# Altium PCB 网关模块8266_1278.PcbDoc
Units mil, origin at the board's own origin, x right, y up, seen from the top; angles counter-clockwise.
Board outline 805.03 x 1542.03 mil, 2 copper layers (Top Layer, Bottom Layer); 53 components, 42 nets, 188 pads, 178 vias.
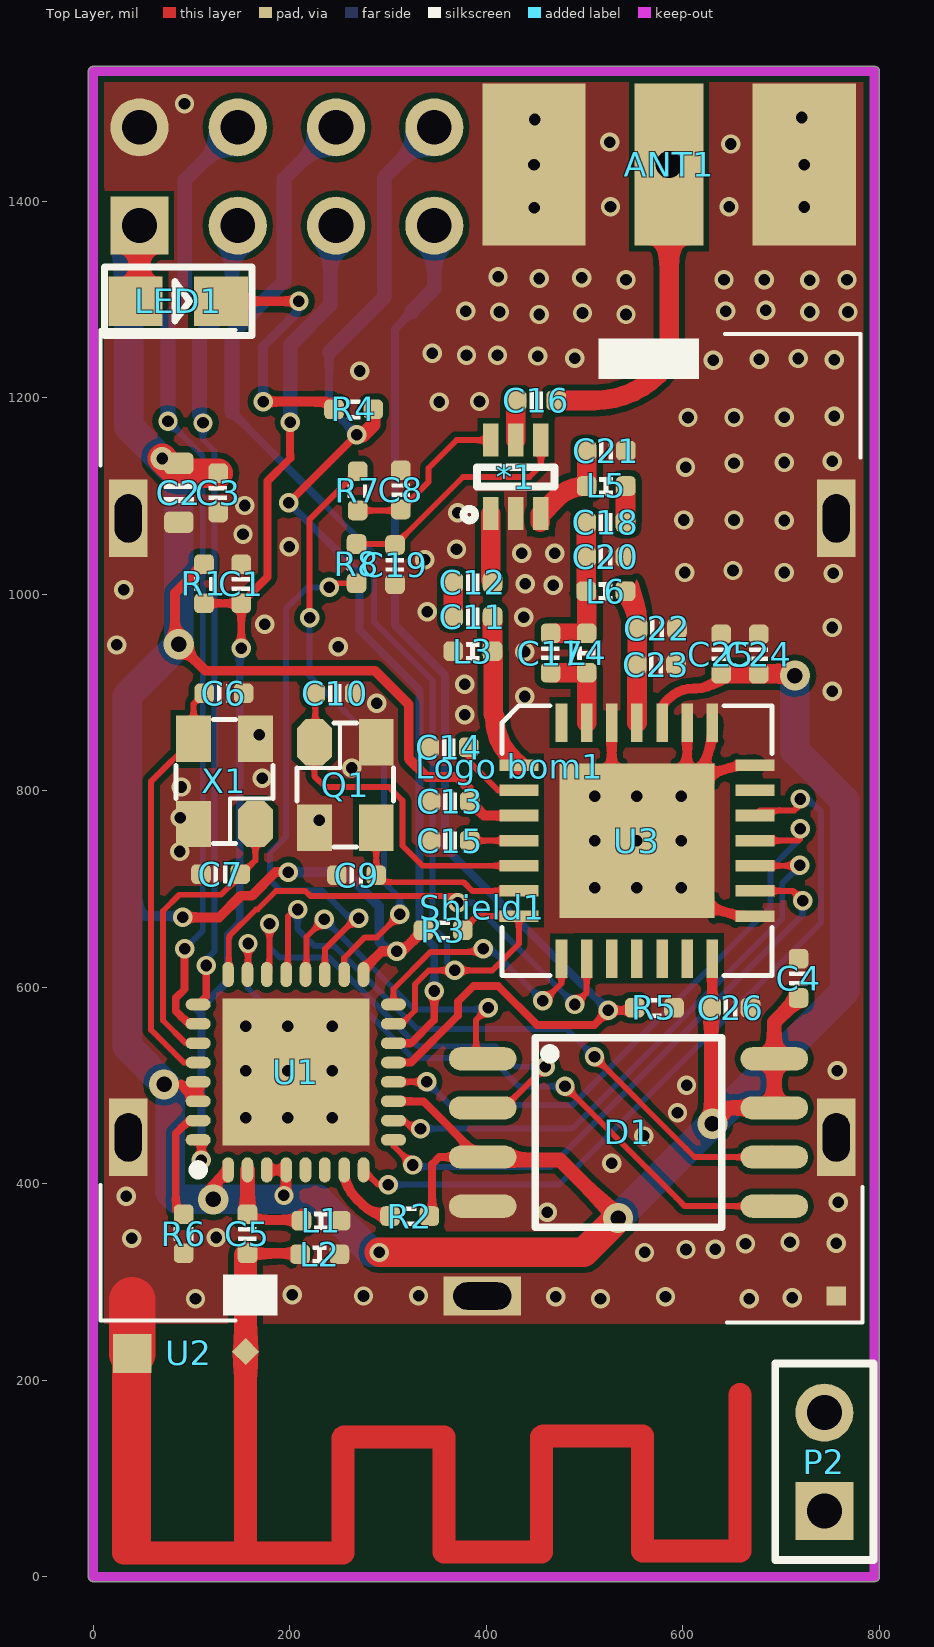
[diagram p0: Top Layer view]
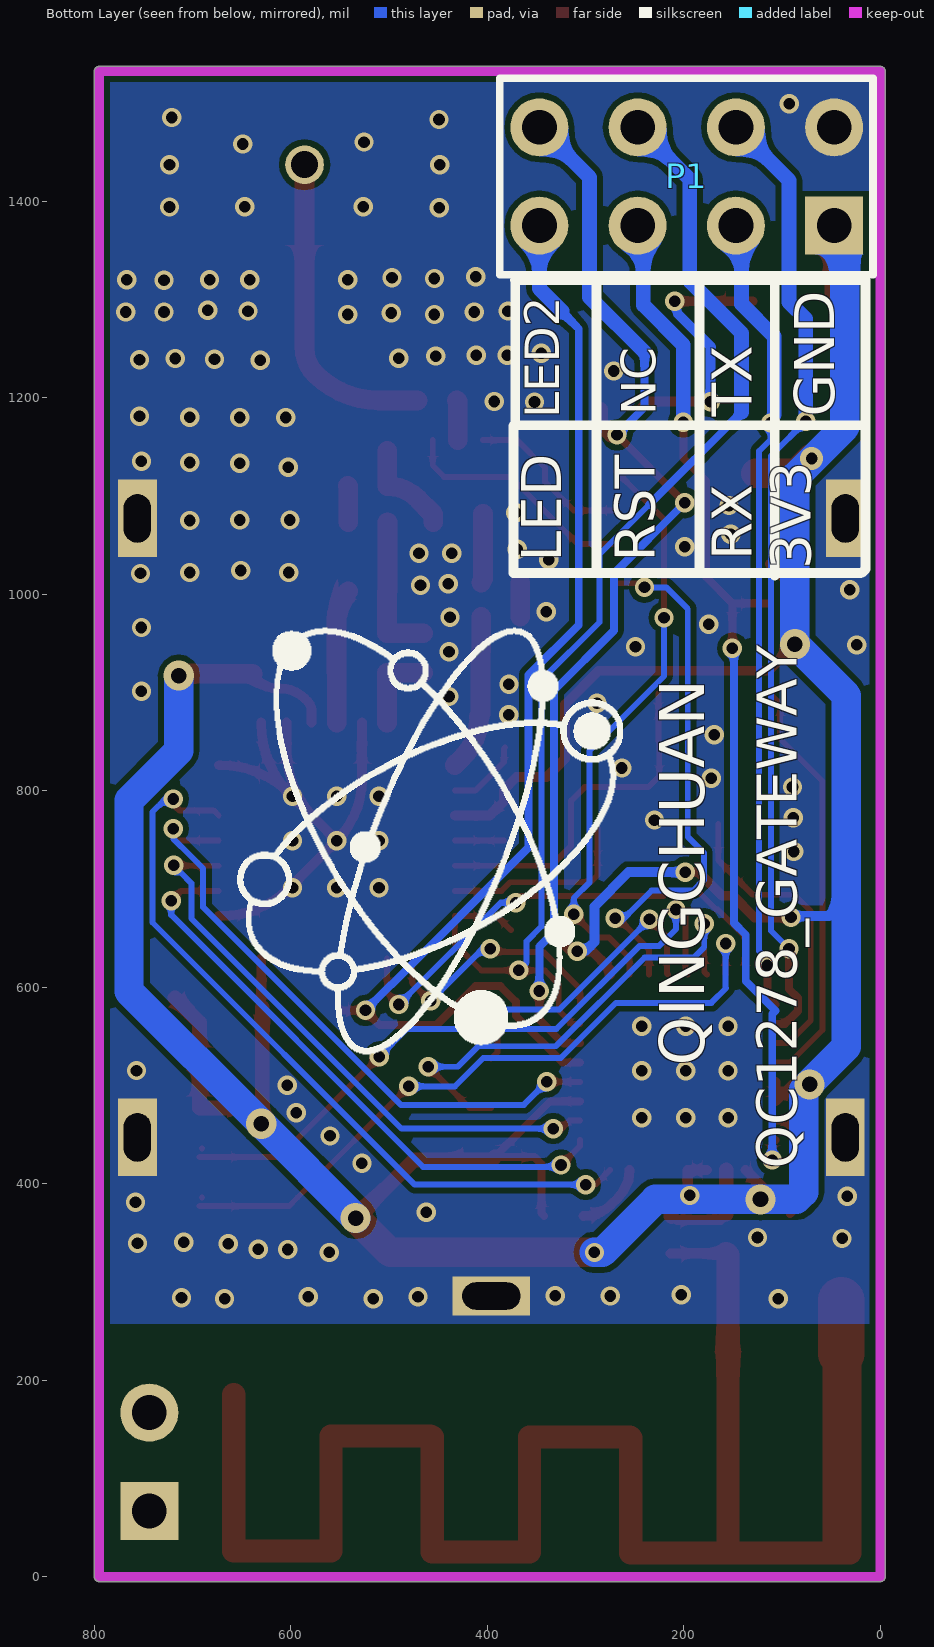
[diagram p1: Bottom Layer view, seen from below]
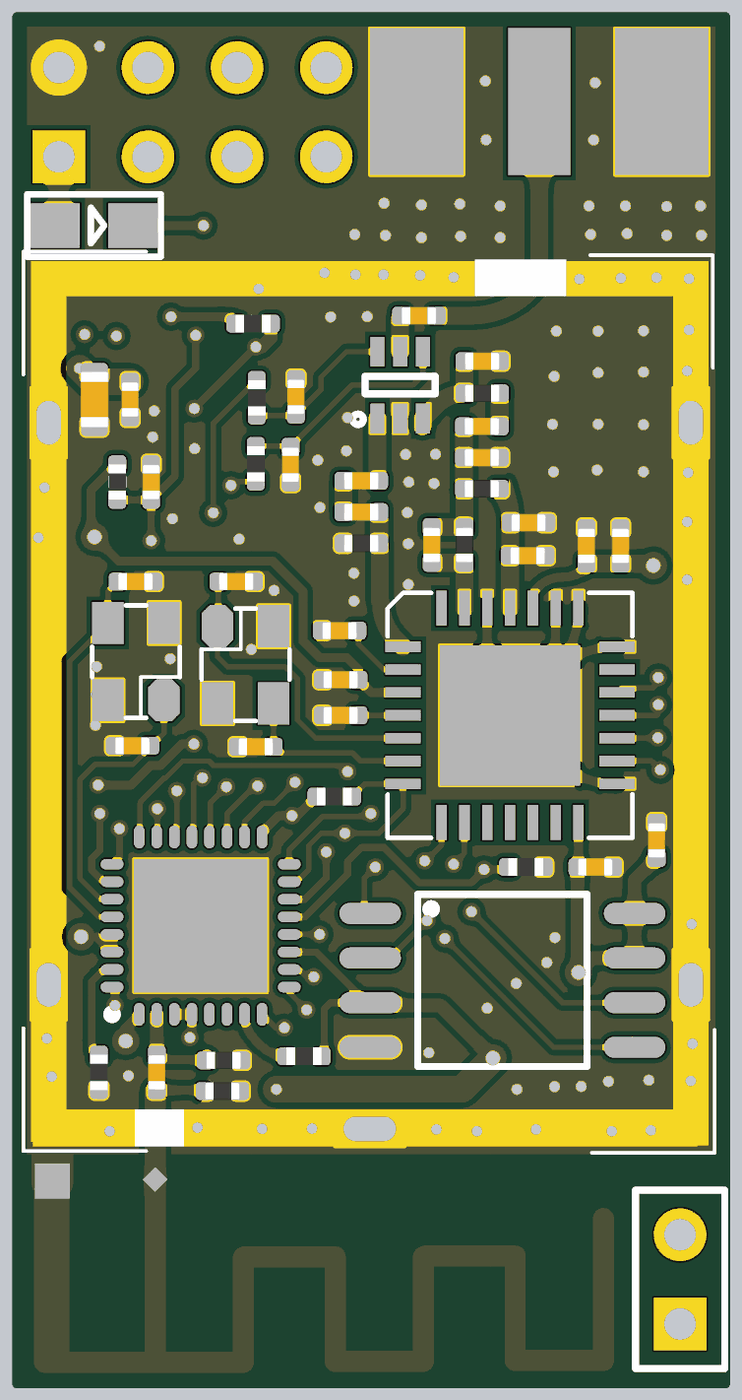
[diagram p2: 3D render of the assembled board from above, using the file's embedded part models]

## Layer stack, top to bottom
Top Solder: solder mask 0.4, Solder Resist, Dk 3.5
Top Layer: signal copper 1.4
Dielectric 1: dielectric 12.6, FR-4, Dk 4.8
Bottom Layer: signal copper 1.4
Bottom Solder: solder mask 0.4, Solder Resist, Dk 3.5

## Board outline
0,-5.01 cw(c0,0) -5.02,0 -5.02,1532 cw(c0,1532) 0,1537.02 795,1537.02 cw(c795,1532) 800.01,1532 800.01,0 cw(c795,0) 795,-5.01

## Design rules (kind name [scope] priority, off if disabled: settings)
Clearance "Stitching No Net" [IsStitchingVia and InNet('No Net') vs (IsVia and (Not IsStitchingVia)) Or IsPad] p1: gap=39.37 ignorepadtopadclearanceinfootprint=FALSE
Clearance [All] p2: gap=6 ignorepadtopadclearanceinfootprint=FALSE
HoleSize [All] p1: absolutevalues=TRUE maxlimit=60 minlimit=3 maxpercent=80.000 minpercent=20.000
HoleToHoleClearance [All] p1: gap=15.75 allowstackedmicrovias=TRUE
MinimumSolderMaskSliver [All] p1: minsoldermaskwidth=0
PlaneConnect [All] p1: planeconnectstyle=Direct reliefexpansion=20 reliefentries=4 reliefconductorwidth=10 reliefairgap=10
PolygonConnect [All] p1: connectstyle=Direct reliefconductorwidth=10 reliefentries=4 polygonreliefangle="90 Angle" airgapwidth=10
RoutingVias [All] p1: holewidth=11.81 width=19.68 viastyle="Through Hole" minholewidth=11.81 minwidth=19.68 maxholewidth=30.81 maxwidth=50.62
SilkToSilkClearance [All] p1: silktosilkclearance=0
SilkToSolderMaskClearance [IsPad] p1: minsilkscreentomaskgap=0 clearancetoexposedcopper=TRUE
SolderMaskExpansion [All] p1: expansion=1.97 useseparateexpansions=TRUE expansionbottom=1.97 soldermaskfromhole=TRUE
Width [All] p1: maxlimit=50 minlimit=6 preferedwidth=6
24 further rules are at their usual default settings.

## Components (designator, comment, footprint, x,y, rotation, side; value= is the part's Value field where it differs from the comment)
*1 "CKRF2179MM26" SC70-6 429.96,1119.2 r90 top
ANT1 "SMA" SMA_EDGE 586,1437 r90 top
C1 "104" CAP_0402 150.59,1010.5 r270 top value=?F
C2 "10uF" CAP_0603 87,1103 r90 top
C3 "104" CAP_0402 127,1103 r90 top value=?F
C4 "104" CAP_0402 717.74,609 r90 top value=?F
C5 "6.8pF" CAP_0402 156.89,349 r90 top value=?F
C6 "9pF" CAP_0402 133,899 r180 top value=?F
C7 "9pF" CAP_0402 129.59,715 r0 top value=?F
C8 "NC" CAP_0402 313,1106 r270 top value=?F
C9 "12PF" CAP_0402 267.91,714 r0 top value=?F
C10 "12PF" CAP_0402 246,899 r180 top value=?F
C11 "22PF" CAP_0402 386.32,976.85 r0 top value=?F
C12 "0" CAP_0402 386.32,1011.85 r180 top value=?F
C13 "104" CAP_0402 363.16,789 r0 top value=?F
C14 "104" CAP_0402 362,844 r0 top value=?F
C15 "104" CAP_0402 363.16,749.08 r0 top value=?F
C16 "56pf" CAP_0402 451,1197 r180 top value=?F
C17 "6.8PF" CAP_0402 465.35,940 r270 top value=?F
C18 "22PF" CAP_0402 521.62,1072.99 r180 top value=?F
C19 "NC" CAP_0402 307,1030 r270 top value=?F
C20 "18PF" CAP_0402 521.62,1038 r180 top value=?F
C21 "6.8PF" CAP_0402 522,1146 r180 top value=?F
C22 "10NF" CAP_0402 574,965 r180 top value=?F
C23 "56PF" CAP_0402 573,928 r180 top value=?F
C24 "104" CAP_0402 677.25,939 r270 top value=?F
C25 "56PF" CAP_0402 639,939 r270 top value=?F
C26 "104" CAP_0402 648.84,579 r0 top value=?F
D1 "W25Q32" W25Q128-1 544.65,452.09 r0 top
L1 "NC" IND_0402 231.82,362.39 r0 top
L2 "NC" IND_0402 230.5,328 r0 top
L3 "33NH" IND_0402 386.32,941.85 r0 top
L4 "3.6NH" IND_0402 502.05,940 r90 top
L5 "18NH" IND_0402 522,1110 r180 top
L6 "18NH" IND_0402 521.62,1003 r180 top
LED1 "BLUE_LED_0603" SMDLED 42.96,1298.06 r0 top
"Logo bom1" "Logo symbol" logo1 424,825 r180 top
P1 "Header 4X2" "MY HDR 2X4" 170.78,1425 r180 bottom
P2 "Header 2" HDR1X2 744,67 r90 top
Q1 "32MHz" 3325 255,804 r270 top value=32.0MHz
R1 "12K" RES_0402 112.59,1010.5 r90 top value=12k
R2 "12K" RES_0402 322,367 r0 top value=12k
R3 "12K" RES_0402 356,658 r180 top value=12k
R4 "820" RES_0402 264.91,1188 r180 top value=12K
R5 "12K" RES_0402 571,579 r0 top value=12k
R6 "12K" RES_0402 91.99,349 r270 top value=12k
R7 "100" RES_0402 269,1105 r270 top
R8 "100" RES_0402 267.91,1031 r90 top
Shield1 "Logo symbol" 24*18_8266 756.09,285.66 r90 top
U1 "ESP8266" ESP8266 206.1,513.41 r90 top
U2 "PCB_ANT" BLE-ANT4 154.8,229.18 r0 top
U3 "SX1278" QFN-28 433.15,825.85 r0 top
X1 "26MHz" CY_3225 135,809 r90 top

## Footprints (in the part's own frame and the unit in brackets; to place one, negate y for a bottom-side part, rotate by r counter-clockwise, add the part's x,y. Pads: shape width x height; smd on the part's side, far side on the other; paste and mask are expansions set on the pad)
24*18_8266 [mm]
  rect 1x2 hole 0.7 slot 1.5 at 90 deg paste+0 mask+0.05: 1(0,9.15)
  rect 0.5x0.5 smd paste-1 mask+0.05: 1(0,0)
  rect 2x1 hole 0.7 slot 1.25 at 0 deg paste+0 mask+0.05: 1(4.1,18.3) 1(4.1,0) 1(20.1,0) 1(20.1,18.3)
  silkscreen extent -0.68,-0.68 24.97,19.02, body extent -0.3,-0.3 0.3,0.3, height 1
3325 [mm]
  oct 1.2x0.9 smd: 1(-1.143,-0.762)
  rect 1.2x0.9 smd: 2(1.057,-0.762) 3(1.057,0.838) 4(-1.143,0.838)
  silkscreen extent -1.64,-1.21 1.56,1.29
BLE-ANT4 [mm]
  rect 0.5x0.5 smd rot 45: 1(0.005,-0.005)
  rect 1x1 smd: 2(-2.923,-0.052)
  Top Layer lines w0.6: -3.145,-0.052 -3.145,-5.208 -2.738,-5.208 ; -2.738,-0.005 -2.738,-0.052 -2.738,-5.208 ; 0.005,-0.005 0.005,-5.208 ; 5.103,-2.211 2.545,-2.211 2.52,-2.236 2.52,-5.208 0.005,-5.208 ; 5.136,-2.211 5.136,-5.183 7.65,-5.183 7.65,-2.211 ; 7.701,-2.186 10.267,-2.186 10.267,-5.157 12.781,-5.157 12.781,-1.119 ; -2.738,-5.208 0.005,-5.208
CAP_0402 [mil]
  rrect50% 20x20 smd: 1(-20,0) 2(20,0)
  silkscreen extent -7,-9 7,9, body extent -20,-10 20,10, height 20
CAP_0603 [mil]
  rrect50% 22x30 smd: 1(-30,0) 2(30,0)
  silkscreen extent -10,-15 10,15, body extent -31,-16 31,16, height 31
CY_3225 [mm]
  oct 1.2x0.9 smd: 1(-1.093,-0.762)
  rect 1.2x0.9 smd: 2(1.107,-0.762) 3(1.107,0.838) 4(-1.093,0.838)
  silkscreen extent -1.59,-1.21 1.61,1.29
ESP8266 [mm] "QFN, 32-Leads, Body 5.0x5.0mm (max), Pitch 0.50mm, IPC Medium Density"
  oval 0.65x0.3 smd: 1(-2.525,1.75) 2(-2.525,1.25) 3(-2.525,0.75) 4(-2.525,0.25) 5(-2.525,-0.25) 6(-2.525,-0.75) 7(-2.525,-1.25) 8(-2.525,-1.75) 17(2.525,-1.75) 18(2.525,-1.25) 19(2.525,-0.75) 20(2.525,-0.25) 21(2.525,0.25) 22(2.525,0.75) 23(2.525,1.25) 24(2.525,1.75)
  oval 0.3x0.65 smd: 9(-1.75,-2.525) 10(-1.25,-2.525) 11(-0.75,-2.525) 12(-0.25,-2.525) 13(0.25,-2.525) 14(0.75,-2.525) 15(1.25,-2.525) 16(1.75,-2.525) 25(1.75,2.525) 26(1.25,2.525) 27(0.75,2.525) 28(0.25,2.525) 29(-0.25,2.525) 30(-0.75,2.525) 31(-1.25,2.525) 32(-1.75,2.525)
  rect 3.8x3.8 smd: 33(0,0)
  silkscreen extent -2.65,2.4 -2.4,2.65
HDR1X2 [mm] "Connector; Header; 2 Position"
  rect 1.5x1.5 hole 0.9 mask+0.05: 1(0,0)
  round 1.5 hole 0.9 mask+0.05: 2(2.54,0)
  silkscreen extent -1.27,-1.27 3.81,1.27
IND_0402 [mil]
  rrect50% 20x20 smd: 1(-20,0) 2(20,0)
  silkscreen extent -6,-9 6,9, body extent -20,-10 20,10, height 20
logo1 [mil]
"MY HDR 2X4" [mm]
  rect 1.5x1.5 hole 0.9 mask+0.05: 1(3.144,-1.27)
  round 1.5 hole 0.9 mask+0.05: 2(3.144,1.27) 3(0.604,-1.27) 4(0.604,1.27) 5(-1.936,-1.27) 6(-1.936,1.27) 7(-4.476,-1.27) 8(-4.476,1.27)
  silkscreen extent -5.5,-2.54 4.15,2.54
QFN-28 [mm]
  rect 4x4 smd: 0(3.05,-1.95)
  rect 1x0.3 smd: 1(0,0) 2(0,-0.65) 3(0,-1.3) 4(0,-1.95) 5(0,-2.6) 6(0,-3.25) 7(0,-3.9) 15(6.1,-3.9) 16(6.1,-3.25) 17(6.1,-2.6) 18(6.1,-1.95) 19(6.1,-1.3) 20(6.1,-0.65) 21(6.1,0)
  rect 0.3x1 smd: 8(1.1,-5) 9(1.75,-5) 10(2.4,-5) 11(3.05,-5) 12(3.7,-5) 13(4.35,-5) 14(5,-5) 22(5,1.1) 23(4.35,1.1) 24(3.7,1.1) 25(3.05,1.1) 26(2.4,1.1) 27(1.75,1.1) 28(1.1,1.1)
  silkscreen extent -0.44,-5.44 6.54,1.54
RES_0402 [mil]
  rrect50% 20x20 smd: 1(-20,0) 2(20,0)
  silkscreen extent -7,-10 7,10, body extent -20,-10 20,10, height 14
SC70-6 [mm] "SC70 6-Leads, Body 2.0x1.25mm, Pitch 0.65mm"
  rect 0.85x0.4 smd mask+0.05: 1(-0.95,0.65) 2(-0.95,0) 3(-0.95,-0.65) 4(0.95,-0.65) 5(0.95,0) 6(0.95,0.65)
  silkscreen extent -1.12,-1 0.25,1.35, body extent -0.63,-1 0.63,1, height 1.45
SMA_EDGE [mil] "SMA Edge connector - modified"
  rect 165x70 smd mask+1.97: 1(0,0)
  round 39.37 hole 27.56: 1(0,0)
  rect 165x105 smd mask+1.97: 2(0,137.5) 2(0,-137.5)
SMDLED [mm]
  rect 1.4x1.27 smd: 1(0.001,-0.002) 2(2.211,-0.002)
  silkscreen extent -0.8,-0.89 3.01,0.89
W25Q128-1 [mm] "SPI_FLASH"
  oval 1.75x0.6 smd: 1(-3.768,1.905) 2(-3.768,0.635) 3(-3.768,-0.635) 4(-3.768,-1.905) 5(3.768,-1.905) 6(3.768,-0.635) 7(3.768,0.635) 8(3.768,1.905)
  silkscreen extent -2.41,-2.45 2.41,2.45

## Part data
*1: library part PE4259
ANT1: "SMA Straight Connector", LatestRevisionDate="05-oct-2007  -  Semtech", LatestRevisionNote="Re-released for DXP Platform.", Publisher="Altium Limited"
C1 C3 C4 C5 C6 C7 C8 C9 C10 C11 C12 C13 C14 C15 C16 C17 C18 C19 C20 C21 C22 C23 C24 C25 C26: library part Cap_0402, "Capacitor", Type=0402
C2: library part Cap_0603, "Capacitor", Type=0603
D1: library part W25Q128
L1 L2 L3 L4 L5 L6: library part Ind_0402, "Inductor", Type=0402
LED1: library part LED2, "Typical RED, GREEN, YELLOW, AMBER GaAs LED", PackageDocument=Feb-2002, LatestRevisionDate=17-Jul-2002, LatestRevisionNote="Re-released for DXP Platform.", PackageReference=3.2X1.6X1.1, Published=8-Jun-2000, Publisher="Altium Limited"
"Logo bom1": library part Logo, "qc symbol for Logo"
P1: "Header, 4-Pin, Dual row", LatestRevisionDate=17-Jul-2002, LatestRevisionNote="Re-released for DXP Platform.", Publisher="Altium Limited"
P2: "Header, 2-Pin", LatestRevisionDate=17-Jul-2002, LatestRevisionNote="Re-released for DXP Platform.", Publisher="Altium Limited"
Q1: library part "Xtal GND", "32M无源晶振 10PPM   年老化3ppm以内", LatestRevisionDate="05-oct-2007  -  Semtech"
R1 R2 R3 R4 R5 R6 R7 R8: library part Res_0402, "Resistor", Type=0402
Shield1: library part Shield, "Shield - EMI Gasket - Standard Surface Mount Shields"
U2: library part 天线
X1: library part XTAL, "24M无源晶振（10ppm）", LatestRevisionDate=17-Jul-2002, LatestRevisionNote="Re-released for DXP Platform.", PackageReference=R38, Published=8-Jun-2000, Publisher="Altium Limited"

## Via types
v1: diameter 19.68, hole 11.81, Top Layer to Bottom Layer, tented both sides, 171 vias
v2: diameter 30.68, hole 15.81, Top Layer to Bottom Layer, tented both sides, 6 vias
v3: diameter 23.62, hole 11.81, Top Layer to Bottom Layer, tented both sides, 1 vias

## Nets (pads, with @x,y where several pads share a name; then routed paths per layer and width w, separated by ;. In a path a pad name is that pad's centre, name@x,y a point inside that pad or via, vN(x,y) a via of type N, cw(c..) or ccw(c..) an arc to the next point about the centre after c; other vN are vias at no path point)
CS: U1.8 U3.19 | length 778
  Top Layer w6: U1.8 290,399 v1(300,399) ; U3.19 678.48,779.84 713.33,779.84 719.49,786 v1(719.49,791.49)
  Bottom Layer w6: v1(300,399) 474,399 740.67,665.67 740.67,778.33 727.51,791.49 v1(719.49,791.49)
D0: D1.2 U1.22 | length 488.9
  Top Layer w6: U1.22 179.29,615.54 v1(179.29,664.54) ; D1.2 418.09,477.09 v1(460,519)
  Bottom Layer w6: v1(179.29,664.54) 179.29,640.71 190,630 240.06,630 330.22,539.84 409.12,539.84 429.96,519 v1(460,519)
D1: D1.5 U1.23 | length 705.6
  Top Layer w6: U1.23 157.48,613.41 v1(157.48,644.36) ; v1(480,499) 593.17,385.83 601.91,377.09 D1.5 ; D1.5@690.37,385.83 D1.5@690.54,386
  Bottom Layer w6: v1(157.48,644.36) 157.48,599.7 156.89,599.11 172,584 269.09,584 325.25,527.84 404.15,527.84 432.99,499 v1(480,499)
DI0: U1.16 U3.8 | length 258.2
  Top Layer w6: U1.16 305.51,598.13 343.22,635.84 393.84,635.84 v1(397,639) ; v1(457.51,586) 458.65,586 476.46,603.81 U3.8
  Bottom Layer w6: v1(397,639) 404.51,639 v1(457.51,586)
DI1: U1.24 U3.9 | length 509.8
  Top Layer w6: U1.24 137.84,613.46 137.84,649.74 138.64,650.54 138.64,652.16 165.48,679 167.1,679 185.94,697.84 215.8,697.84 220.8,692.84 364.16,692.84 v1(371,686) ; v1(490,582.31) 502.05,594.35 U3.9
  Bottom Layer w6: v1(371,686) 386.31,686 v1(490,582.31)
EN: R2.1 U1.7 | length 72.5
  Top Layer w10: U1.7 ccw(c295.6,414) 267.11,385.51 274.05,378.58 ccw(c302,406.53) R2.1
FCLK: D1.6 U1.21 | length 671.1
  Top Layer w6: U1.21 198.13,614.69 198.13,672.13 v1@205,679 ; v1(510,529) 603.17,435.83 611.91,427.09 D1.6 ; D1.6@690.37,435.83 D1.6@690.54,436
  Bottom Layer w6: v1(208,679) 208,659 225,642 245.03,642 329.74,557.29 481.71,557.29 v1(510,529)
FCS: D1.1 U1.20 | length 329.7
  Top Layer w6: U1.20 217,613.87 217,651 v1(235,669) ; D1.1 389.65,533.74 389.65,566.65 v1(402,579)
  Bottom Layer w6: v1(235,669) 326.84,577.16 400.16,577.16 v1(402,579)
GND: *1.2 ANT1.2 C1.1 C2.1 C3.1 C4.2 C5.1 C6.1 C7.1 C8.1 C9.1 C10.1 C13.1 C14.1 C15.1 C19.2 C20.1 C21.1 C22.1 C23.1 C24.1 C25.1 C26.2 D1.4 L1.2 L2.1 L2.2 L3.1 P1.2 Q1.2 Q1.4 R5.2 R6.2 Shield1.1 U1.33 U2.1 U2.2 U3.0 U3.15 U3.21 U3.22 U3.23 U3.26 X1.2 X1.4 | length 817.7
  Top Layer w10: C5.1 L2.1@213.5,329 ; U3.26 527.64,810.86 ccw(c615.01,810.86) v1(553.23,749.08) ; U3.23 604.41,841.68 cw(c504.41,841.68) U3.0@575.12,770.97 ; U3.22 630,867.27 cw(c530,867.27) U3.0@600.71,796.56 ; U3.15 671.42,672.31 cw(c671.42,772.31) 600.71,701.6 v1(553.23,749.08) ; U3.21 671.42,825.85 ccw(c671.42,725.85) U3.0@600.71,796.56 ; v1(553.23,749.08) U3.0@575.12,770.97 ; U3.0@575.12,770.97 v1(598.23,794.08) U3.0@600.71,796.56
  Top Layer w23.62: U2.1 C5.1@155,327.11
  Top Layer w47.24: U2.2 39.71,281.57
  other v1: 104,283 516.16,283 667.41,283 711.2,284 470.57,285 582.33,285 275,285.66 331,286 202.49,287 561,330 603.18,333 633,333.29 663.71,338.85 756,339.36 708.98,340.22 39,344.25 125.07,345.14 462,371 758,381 33.62,387 527.61,420.89 560.16,448.55 155,467 198,467 243,467 594.49,472 603.75,500 155,515 198,515 243,515 757,515.08 155,560 198,560 243,560 510.23,701.08 553.23,701.08 598.23,701.08 88,738 510.23,749.08 598.23,749.08 229.82,770 88.59,772.42 510.23,794.08 553.23,794.08 89.43,803.63 172,812.48 263,822.96 169,857 378.16,877.09 288.42,889 439,895.72 752,901 378,908.39 439,941.44 249.19,946.5 24,948.23 752,966 174.49,969.4 438,976.35 340,982 31,1004.27 468,1008.93 439.64,1010.5 753,1021 602,1022 702.99,1022 651,1024 337.48,1034.99 436.1,1041.42 469.57,1041.71 369.66,1045.5 199.24,1048 152.38,1061 600.89,1075.34 652,1075.34 702.99,1074.85 371,1082.83 154,1090.11 602.72,1129 652,1133 702.99,1133.85 752,1135.08 605.17,1179.66 652,1179.66 702.99,1180 754,1181 352,1195.51 393,1196 271.22,1227 631,1238 754,1238.42 677.6,1239 490,1240 717.58,1239.71 452.42,1242.21 379.82,1243 411.32,1243 345,1245 453.82,1284.49 542.11,1284.49 497.85,1286 413.42,1287 729,1287 768,1287 379,1288 643.61,1288 684.52,1288.95 729,1319.4 542.11,1320 641.81,1320 682.67,1320 767,1320 453.82,1321.12 497,1322.07 411.9,1323 448.76,1393 526.37,1394 647,1394 723.5,1393.96 448.5,1437 723.5,1437 648.84,1458 525.52,1460 449.14,1483 721,1485 92.83,1499
IO2: P1.8 R4.1 U1.14 | length 1142.3
  Top Layer w8: v1(199,1093) v1(268,1162) ; U1.14 323.25,542.94 347,566.69 v1(347,596)
  Top Layer w15: v1(268,1162) 274.51,1162 284.91,1172.4 R4.1
  Bottom Layer w8: v1(199,1093) 271.06,1020.94 271.06,962.94 332,902 332,656.31 347,641.31 v1(347,596) ; 240,1246 240,1190 v1(268,1162)
  Bottom Layer w15: 240,1246 296,1302 296,1424 P1.8
IO9: R7.1 U1.18 | length 601.2
  Top Layer w6: v1(220.16,976) 220.16,1076.16 R7.1 ; U1.18 255.32,629.65 276.32,650.65 288.65,650.65 v1(312,674)
  Bottom Layer w6: v1(220.16,976) 220.16,916.44 295.84,840.76 295.84,706.77 312,690.61 v1(312,674)
IO10: R8.1 U1.19 | length 548.6
  Top Layer w6: U1.19 235.63,638.59 262.9,665.86 262.9,669.1 263.8,670 v1(270,670) ; v1(240.06,1006.88) 244.18,1011 R8.1
  Bottom Layer w6: v1(240.06,1006.88) 217.91,1006.88 196,984.97 196,753 179.66,736.66 179.66,709.2 190.7,698.16 232.84,698.16 262.35,668.65 262.35,669.65 262.7,670 v1(270,670)
IO15_F: P1.7 R5.1 U1.13 | length 1223.8
  Top Layer w8: U1.13 323.36,523.25 371,570.89 371,585.25 386.75,601 412.16,601 451.66,561.5 509.76,561.5 v1@524.62,576.37 ; v1(524,576.37) v1@524.62,576.37 ; R5.1 548.37,576.37 v1@524.62,576.37
  Bottom Layer w8: 324,1287 307,1270 307,968.56 358,917.56 358,742 497.85,602.15 498.22,602.15 v1(524,576.37)
  Bottom Layer w15: 324,1287 324,1288 347,1311 P1.7 P1.7@341.22,1369.22
MISO: U1.10 U3.17 | length 607.8
  Top Layer w6: U1.10 316.58,464.2 324.78,456 v1(333,456) ; U3.17 719.49,723.49 v1(719,724)
  Bottom Layer w6: v1(333,456) 487.32,456 701.16,669.83 701.16,705.7 712.2,716.74 717.74,716.74 725,724 v1(719,724)
MOSI: U1.12 U3.18 | length 626
  Top Layer w6: U1.12 v1(339.43,503.57) ; U3.18 717.58,749.08 719.49,750.99 v1(719.49,761)
  Bottom Layer w6: v1(339.43,503.57) 362.84,480.16 488.04,480.16 689.16,681.28 689.16,720.8 711.2,742.84 711.34,742.84 719.49,750.99 v1(719.49,761)
Net*1_1: *1.1 C12.1 | length 70.5
  Top Layer w20: *1.1 404.37,1016.55 ccw(c411.02,1016.55) C12.1
Net*1_3: *1.3 C21.2 L5.2 | length 101.3
  Top Layer w20: *1.3@455,1073 455,1081.25 *1.3 470.85,1097.1 cw(c502,1065.94) L5.2 C21.2
Net*1_4: *1.4 C19.1 R8.2 | length 247.3
  Top Layer w6: R8.2 306,1051 C19.1 376.2,1119.2 443.98,1119.2 455.55,1130.77 *1.4
Net*1_5: *1.5 C16.2 | length 40.7
  Top Layer w20: *1.5 429.96,1194.49 cw(c433.51,1194.49) C16.2
Net*1_6: *1.6 C8.2 R7.2 | length 173.2
  Top Layer w6: R7.2 312,1085 C8.2 341.22,1114.22 341.22,1128.22 369.6,1156.6 *1.6
NetANT1_1: ANT1.1 C16.1 | length 327.2
  Top Layer w20: C16.1 509.94,1197 ccw(c509.94,1289.18) 575.12,1224 ccw(c548.85,1250.27) 586,1250.27 ANT1.1@586,1437
NetC5_2: C5.2 L1.1 U1.2 | length 106.7
  Top Layer w10: C5.2 162.73,363.16 206.63,363.16 211.74,368.26 L1.1@213,367
  Top Layer w15: C5.2 U1.2 ; L1.1@212.61,366.61 L1.1@213,367
NetC6_2: C6.2 U1.28 X1.3 | length 430.2
  Top Layer w6: U1.28 92,523.25 58.9,556.35 58.9,809.47 X1.3 102.01,888.01 C6.2 C6.2@116.65,899
NetC7_2: C7.2 U1.27 X1.1 | length 309.2
  Top Layer w6: U1.27 94.05,542.94 70.9,566.09 70.9,677.55 87.35,694 130,694 165,729 X1.1
NetC9_2: C9.2 Q1.3 U3.6 | length 200.3
  Top Layer w6: Q1.3 287.91,762.31 C9.2 295.15,706.77 376.88,706.77 385.75,697.9 U3.6
NetC10_2: C10.2 Q1.1 U3.5 | length 357.5
  Top Layer w6: C10.2 226,850 Q1.1 225,814.69 236.21,803.48 300.96,803.48 314.71,789.74 314.71,743.88 335.1,723.49 U3.5
NetC11_1: C11.1 C12.2 | length 35
  Top Layer w20: C11.1 C12.2
NetC11_2: C11.2 L3.2 U3.1 | length 155.9
  Top Layer w20: C11.2 L3.2 cw(c405.34,940.87) 406.72,940.87 407,940.59 407,878 ; 408.41,875 ccw(c467.34,875) 425.67,833.33 U3.1
NetC14_2: C14.2 U3.2 | length 77.4
  Top Layer w6: C14.2 383.16,842.84 383.16,829 411.9,800.26 U3.2
NetC15_2: C15.2 U3.4 | length 50
  Top Layer w6: C15.2 U3.4
NetC17_1: C17.1 C18.2 C20.2 L4.2 L6.2 | length 149.8
  Top Layer w20: C17.1 L4.2 502.05,1001.96 ccw(c500.58,1001.96) L6.2 C20.2 C18.2
NetC17_2: C17.2 L4.1 U3.27 | length 87.5
  Top Layer w20: C17.2 L4.1 U3.27
NetC18_1: C18.1 L5.1 | length 37.2
  Top Layer w20: C18.1 541.62,1109.62 L5.1
NetC22_2: C22.2 C23.2 L6.1 U3.25 | length 137.1
  Top Layer w20: L6.1 cw(c512.93,974.31) 553.5,974.31 553.5,957.75 553.5,921.07 553.23,920.79 U3.25
NetLED1_2: LED1.2 R4.2 | length 271.5
  Top Layer w10: LED1.2 v1(209.25,1298) ; v1(172.84,1195.84) 237.07,1195.84 R4.2
  Bottom Layer w10: v1(172.84,1195.84) 172.84,1250.64 172.16,1251.32 205.83,1285 ccw(c182.8,1298) v1(209.25,1298)
NetR6_1: R6.1 U1.31 | length 113.7
  Top Layer w8: R6.1 83.9,377.09 83.9,451.1 96.99,464.2 U1.31
NRESET: P1.6 R3.1 U1.15 U3.7 | length 1264.1
  Top Layer w6: U1.15 313.8,562.62 327.31,576.13 327.31,602.95 341.35,617 v1(367.91,617) 406,617 433.15,644.15 U3.7 390.31,672.31 R3.1
  Bottom Layer w6: 235.63,1090.59 285.85,1040.37 285.85,971.32 345,912.17 345,661.7 360,646.7 360,624.91 v1(367.91,617)
  Bottom Layer w8: 141.22,1185 235.63,1090.59
  Bottom Layer w15: 141.22,1185 141.22,1265.52 194,1318.3 194,1422 P1.6
RESET: C1.2 P1.5 R1.1 U1.32 | length 1070.5
  Top Layer w8: U1.32 110,441.2 v1(110,424) ; R1.1 C1.2 ; v1(150.59,944.91) C1.2 ; v1(200.5,1175) 200.31,1174.82 200.31,1141.78 200.5,1141.6 200.5,1138.21 177.35,1115.06 177.35,1017.26 C1.2
  Bottom Layer w8: v1(110,424) 110,572.69 106.69,576 136.99,606.3 136.99,653.34 149,665.35 149,943.33 v1(150.59,944.91)
  Bottom Layer w15: v1(200.5,1175) 200.5,1253.5 241.22,1294.22 241.22,1369.22 P1.5
RX: P1.3 U1.25 | length 821.3
  Top Layer w8: U1.25 115,590.61 v1(115,622)
  Bottom Layer w6: v1(111.58,1174.16) 111.58,1157.39 123.34,1145.63 123.34,636.65 115,628.31 v1(115,622)
  Bottom Layer w15: v1(111.58,1174.16) 108,1182.58 108,1262 141.22,1295.22 141.22,1369.22 P1.3
SCK: U1.9 U3.16 | length 605.6
  Top Layer w6: U1.9 305.51,438.49 v1(325,419) ; U3.16 711.93,697.9 v1(721.83,688)
  Bottom Layer w6: v1(325,419) 325,417.13 465.43,417.13 721.83,673.53 v1(721.83,688)
TX: P1.4 U1.26 | length 982.9
  Top Layer w8: v1(92.97,639) 92.97,597.97 83.9,588.9 83.9,575.72 96.99,562.62 U1.26
  Bottom Layer w6: v1(76,1176) 111.34,1140.66 111.34,657.37 v1(92.97,639)
  Bottom Layer w15: v1(76,1176) 76,1280 93,1297 93,1421 P1.4
VCC: C2.2 C3.2 C4.1 C13.2 C24.2 C25.2 C26.1 D1.3 D1.7 D1.8 LED1.1 P1.1 R1.2 R2.2 R3.2 U1.1 U1.3 U1.4 U1.11 U1.17 U1.29 U1.30 U3.3 U3.14 U3.24 | length 4381.7
  Top Layer w8: P1.1@42.99,1370.99 P1.1 ; U1.11 305.67,483.72 335.93,483.72 D1.3@392.57,427.09 ; R2.2 344.84,369.84 344.84,419.84 352.09,427.09 D1.3@392.57,427.09 ; D1.3@392.65,427 D1.3@392.57,427.09 ; D1.3 D1.3@392.57,427.09
  Top Layer w10: 89.57,501 U1.30 U1.29 ; v1(91,671) 128,671 150,693 161.3,693 185.3,717 v1(198.5,717) ; R1.2 83.09,1001 83.09,952.91 v2(87,949) 114,922 286.79,922 321,887.79 321,832.37 339.53,813.84 370.16,813.84 383.16,800.84 C13.2 397.49,774.67 U3.3 ; v2(122,384) 122,398.8 U1.1 ; U1.3 U1.4 196.26,390.26 v1(194,388) ; U1.17 275,618 293.65,636.65 v1(308.65,636.65) 314.65,636.65 R3.2 ; U3.24 578.82,880.91 cw(c593.09,880.91) 583,891 585.39,893.39 cw(c611,867.79) 611,904 613.44,904 ccw(c613.44,941.56) C25.2@640,915 ; C26.1 629,579.16 630,580.16 U3.14
  Top Layer w15: D1.3@392.65,427 395.65,424 475,424 v2(534,365) ; C26.1@629,579.16 629,462 v2(630,461) 646.09,477.09 D1.7 D1.8@693,520.43 ; D1.8 693,564.26 C4.1
  Top Layer w20: LED1.1 47,1302.01 P1.1 ; C25.2 C24.2 712,919 v2(714,917)
  Top Layer w30: v3(70,1138) 85,1123 C3.2 ; v1(291,330) 499,330 v2(534,365)
  Bottom Layer w10: 34.63,690 52.31,672.31 89.69,672.31 v1(91,671) ; v1(198.5,717) 256.17,717 291,682.17 291,646 300.35,636.65 v1(308.65,636.65)
  Bottom Layer w30: P1.1 36.16,1364.16 36.16,1170.05 87,1119.2 v2(87,949) 34.63,896.63 34.63,690 34.63,539.37 78.21,495.79 78.21,391.42 85.63,384 v2(122,384) 228.91,384 282.91,330 v1(291,330) ; v2(534,365) v2(630,461) 764.67,595.67 764.67,789.93 714,840.59 v2(714,917)
  other v2: 72,501
pads on no net: P2.1 P2.2 U1.5 U1.6 U3.10 U3.11 U3.12 U3.13 U3.20 U3.28

## Polygon pours and split planes (outlines as drawn)
GND on Top Layer "GND_L01_P022" (solid, remove dead copper, pour order 22): 0,1532 795,1532 795,257.19 0,257.19
no net on Top Layer "Top Layer-No Net" (solid, pour order 16): -4,880.91
no net on Top Layer "Top Layer-No Net 1" (solid, pour order 10): -5,1650
no net on Top Layer "Top Layer-No Net 2" (solid, pour order 8): 0,1644
GND on Bottom Layer "GND_L02_P018" (solid, remove dead copper, pour order 18): 0,1532 795,1532 795,257.19 0,257.19

## Keep-outs
Keep-Out Layer:
  lines w10: 0,0 0,1532 795,1532 795,1169 795,0 0,0

## Silkscreen, mask and mechanical layers (free items; w line width, h text height)
Bottom Overlay:
  lines w10: 18.6,1021.7 15,1025.3 15,1171.79 ; 19.92,1021.54 373.32,1021.54 373.32,1171.3 ; 107.47,1018.94 107.47,1314.51 ; 184,1024.28 184,1319.43 ; 289,1024.28 289,1318.27 ; 372,1171.45 371.66,1171.79 ; 15,1171.79 15,1319.12 15.31,1319.43 371.84,1319.43 371.66,1319.25 371.66,1171.79 ; 15,1171.79 371.66,1171.79
  text "NC" at 217,1181.73 h60 r270
  text "GND" at 33,1180.53 h70 r270
  text "TX" at 117,1180.53 h70 r270
  text "LED2" at 315,1178.77 h60 r270
  text "RX" at 117,1034.25 h70 r270
  text "RST" at 216,1032.77 h70 r270
  text "LED" at 311,1032.77 h70 r270
  text "3V3" at 56.96,1025 h70 r270
  text "QC1278_GATEWAY" at 71.61,415.15 h70 r270

## Text inside footprints (layer, text, board x,y; h text height)
"Logo bom1": Bottom Overlay "QINGCHUAN" at 164.16,519.88 h78.74 r270